# EAGLE board ArduFocuser_V0.09 (EAGLE 6.3)
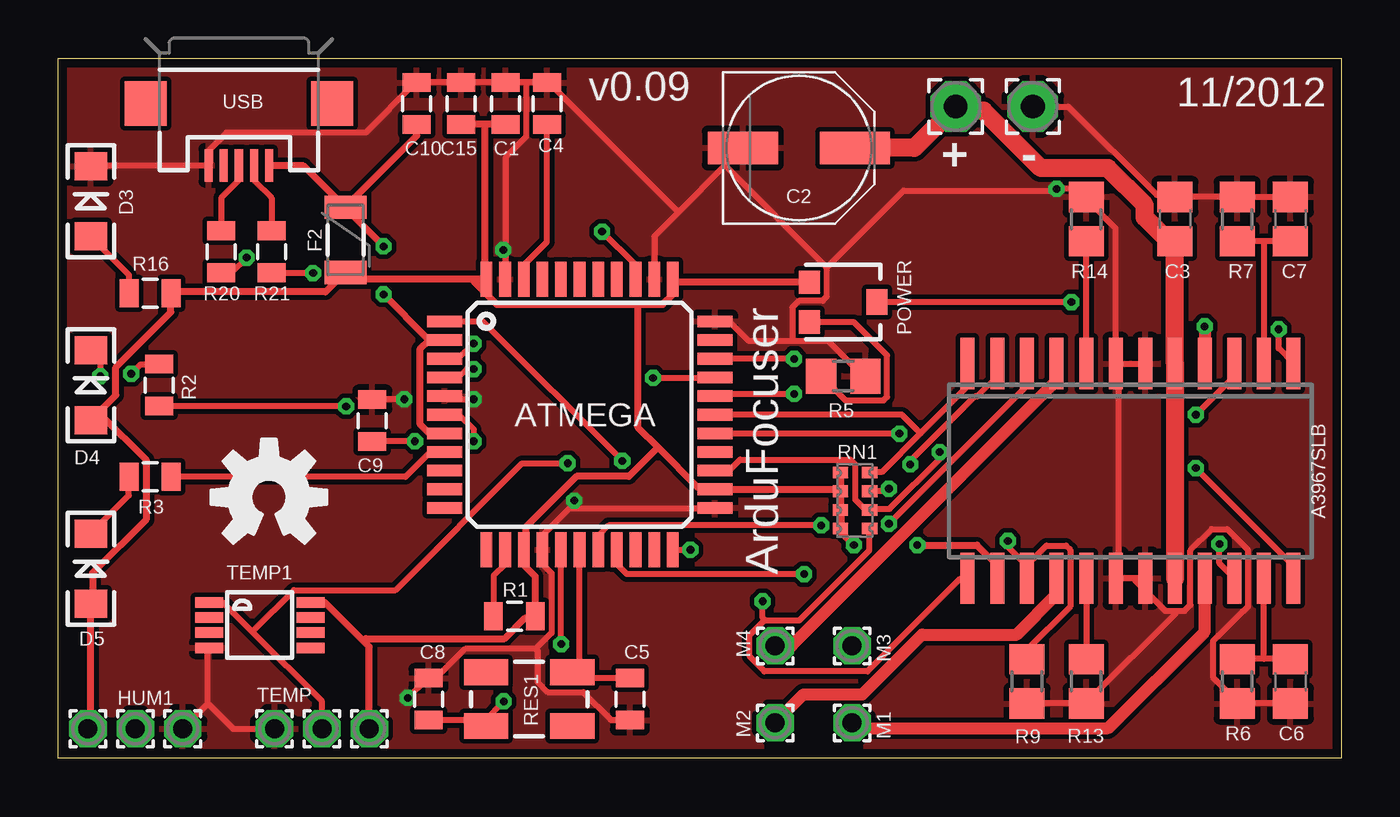
[diagram p0: board, top side]
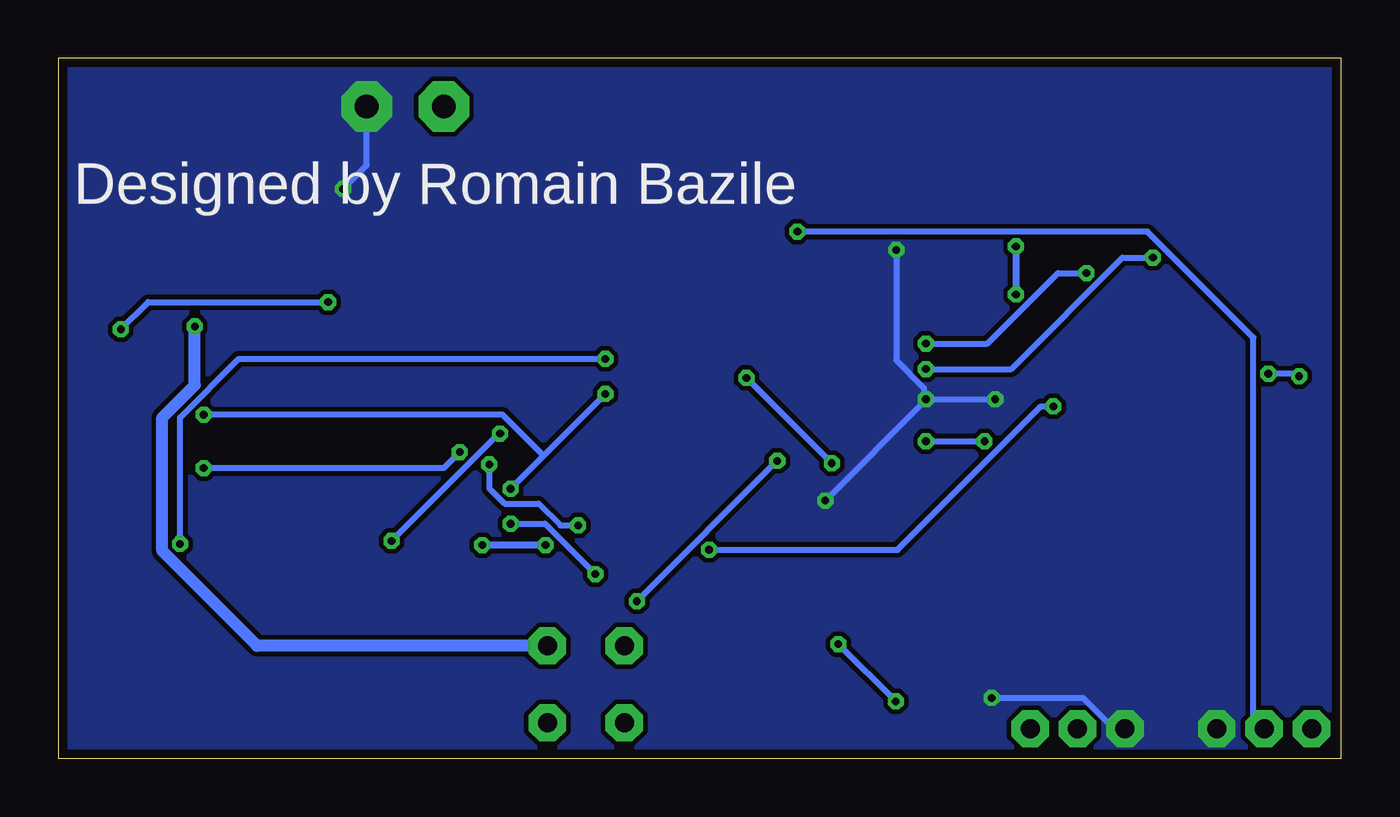
[diagram p1: board, bottom side, seen from below]

Size 55.01 x 30 mm. Coordinates in mm from the lower left corner, seen from the top.
Outline: 55.01,30 55.01,0 0,0 0,30 55.01,30
Copper layers (1*16): Top 0.0356mm / dielectric 1.5011mm / Bottom 0.0356mm
Design rules "LaenPCBOrder *": minimum track width 6mil, minimum drill 13mil, track to track 6mil, track to pad 6mil, pad to pad 6mil, via to via 6mil, smd to smd 6mil, copper to edge 15mil, drill to drill 6mil, minimum pad ring 7mil, minimum via ring 7mil, stop-mask expansion 4mil, vias tented up to drill 0mil, thermal gap 10mil
Net classes: 0 default: width 0.254 mm; 1 power: width 0.762 mm; 2 MOTOR OUT: width 0.508 mm; 3 usbvcc: width 0.305 mm; 4 aref: width 0.305 mm; 5 VCC: width 0.305 mm

## Footprints (pad centres in the part's own frame; a part is rotated, then mirrored left to right if it is on the bottom)
TQFP44 = smd 1.5 x 0.5: 1 -5.8,4; 2 -5.8,3.2; 3 -5.8,2.4; 4 -5.8,1.6; 5 -5.8,0.8; 6 -5.8,0; 7 -5.8,-0.8; 8 -5.8,-1.6; 9 -5.8,-2.4; 10 -5.8,-3.2; 11 -5.8,-4; 23 5.8,-4; 24 5.8,-3.2; 25 5.8,-2.4; 26 5.8,-1.6; 27 5.8,-0.8; 28 5.8,0; 29 5.8,0.8; 30 5.8,1.6; 31 5.8,2.4; 32 5.8,3.2; 33 5.8,4 | smd 0.5 x 1.5: 12 -4,-5.8; 13 -3.2,-5.8; 14 -2.4,-5.8; 15 -1.6,-5.8; 16 -0.8,-5.8; 17 0,-5.8; 18 0.8,-5.8; 19 1.6,-5.8; 20 2.4,-5.8; 21 3.2,-5.8; 22 4,-5.8; 34 4,5.8; 35 3.2,5.8; 36 2.4,5.8; 37 1.6,5.8; 38 0.8,5.8; 39 0,5.8; 40 -0.8,5.8; 41 -1.6,5.8; 42 -2.4,5.8; 43 -3.2,5.8; 44 -4,5.8
0805 = smd 0.8 x 1.2: 1 -0.9,0; 2 0.9,0
PANASONIC_D@1 = smd 3 x 1.4: + 2.4,0; - -2.4,0
C0805 = smd 1.3 x 1.5: 1 -0.95,0; 2 0.95,0
LED-1206 = smd 1.2 x 1.4: A -1.5,0; C 1.5,0
PTC-1206 = smd 1 x 1.8: 1 -1.4,0; 2 1.4,0
1,6/0,8 = drill 0.813 pad 1.6 octagon: 1 0,0
SO24W = smd 0.6 x 2.2: 1 -6.985,-4.6; 2 -5.715,-4.6; 3 -4.445,-4.6; 4 -3.175,-4.6; 5 -1.905,-4.6; 6 -0.635,-4.6; 7 0.635,-4.6; 8 1.905,-4.6; 9 3.175,-4.6; 10 4.445,-4.6; 11 5.715,-4.6; 12 6.985,-4.6; 13 6.985,4.6; 14 5.715,4.6; 15 4.445,4.6; 16 3.175,4.6; 17 1.905,4.6; 18 0.635,4.6; 19 -0.635,4.6; 20 -1.905,4.6; 21 -3.175,4.6; 22 -4.445,4.6; 23 -5.715,4.6; 24 -6.985,4.6
2,15/1,0 = drill 1.016 pad 2.159 octagon: 1 0,0
TRIMPOT-3MM = smd 1 x 0.9: 1 -0.85,-1.45; 3 0.85,-1.45 | smd 1.1 x 0.9: 2 0,1.45
R0805 = smd 1.3 x 1.5: 1 -0.95,0; 2 0.95,0
CRYSTAL-SMD-5X3 = smd 1.9 x 1.1: 1 -1.85,-1.15; 2 1.85,-1.15; 3 1.85,1.15; 4 -1.85,1.15
0603-ARC = smd 0.5 x 0.65: 1 -1.2,-0.625; 2 -0.4,-0.625; 3 0.4,-0.625; 4 1.2,-0.625; 5 1.2,0.625; 6 0.4,0.625; 7 -0.4,0.625; 8 -1.2,0.625
UMAX8 = smd 0.45 x 1.2: 1 -0.975,-2.175; 2 -0.325,-2.175; 3 0.325,-2.175; 4 0.975,-2.175; 5 0.975,2.175; 6 0.325,2.175; 7 -0.325,2.175; 8 -0.975,2.175
USB-MICROB = smd 0.35 x 1.4: D+ 0,2.65; D- -0.65,2.65; GND 1.3,2.65; ID 0.65,2.65; VBUS -1.3,2.65 | smd 1.8 x 1.9: MT1 -4,0; MT2 4,0

## Placement (x,y rotation side)
ATMEGA  ATMEGA32U4-AU  [TQFP44]  22.35,14.73 0 top
C1  1uF  [0805]  19.18,28.07 90 top
C2  100uF  [PANASONIC_D@1]  31.75,26.16 0 top
C3  .1uF  [C0805]  47.88,23.11 90 top
C4  0.1uF  [0805]  20.95,28.07 270 top
C5  22pF  [0805]  24.51,2.54 270 top
C6  680pF  [C0805]  52.83,3.3 270 top
C7  680pF  [C0805]  52.83,23.11 90 top
C8  22pF  [0805]  15.88,2.54 90 top
C9  1uF  [0805]  13.46,14.48 270 top
C10  1uF  [0805]  15.37,28.07 270 top
C15  0.1uF  [0805]  17.27,28.07 270 top
D3  Red  [LED-1206]  1.4,23.88 90 top
D4  Green  [LED-1206]  1.4,16 90 top
D5  Yellow  [LED-1206]  1.4,8.13 90 top
F2  500mA  [PTC-1206]  12.32,22.23 270 top
HUM1  [1,6/0,8]  3.3,1.27 0 top
IC3  A3967SLB  [SO24W]  45.97,12.32 180 top
M1  [1,6/0,8]  34.04,1.52 180 top
M2  [1,6/0,8]  30.73,1.52 180 top
M3  [1,6/0,8]  34.04,4.83 180 top
M4  [1,6/0,8]  30.73,4.83 0 top
PAD1  [1,6/0,8]  1.27,1.27 0 top
PAD2  [1,6/0,8]  5.33,1.27 0 top
PAD8  [1,6/0,8]  9.27,1.27 0 top
PAD10  [1,6/0,8]  13.34,1.27 0 top
PAD11  [2,15/1,0]  41.78,27.94 0 top
PAD12  [2,15/1,0]  38.48,27.94 0 top
POWER  [TRIMPOT-3MM]  33.66,19.56 270 top
R1  10K  [0805]  19.56,6.1 0 top
R2  330  [0805]  4.32,16 90 top
R3  330  [0805]  3.94,12.06 180 top
R5  5.1K  [R0805]  33.66,16.38 180 top
R6  20K  [R0805]  50.55,3.3 90 top
R7  20K  [R0805]  50.55,23.11 270 top
R9  10K  [R0805]  41.53,3.3 90 top
R13  .75  [R0805]  44.07,3.3 90 top
R14  .75  [R0805]  44.07,23.11 270 top
R16  1K  [0805]  3.94,19.94 0 top
R20  22  [0805]  6.99,21.72 90 top
R21  22  [0805]  9.14,21.72 90 top
RES1  16MHz  [CRYSTAL-SMD-5X3]  20.19,2.54 0 top
RN1  10K  [0603-ARC]  34.16,11.05 90 top
TEMP  [1,6/0,8]  11.3,1.27 0 top
TEMP1  DS18B20U  [UMAX8]  8.64,5.71 270 top
U$3  [OSHW-LOGO-M]  9.03,11.19 0 top
USB  USB-MICROB  [USB-MICROB]  7.75,28.07 180 top

## Library data of the parts
ATMEGA = adafruit
C1 C4 C5 C8-C10 C15 D3-D5 F2 POWER R1-R3 R16 R20 R21 RES1 U$3 USB = SparkFun
C2 C3 C6 C7 R5-R7 R9 R13 R14 = rcl
HUM1 M1-M4 PAD1 PAD2 PAD8 PAD10-PAD12 TEMP = wirepad
IC3 = Allegro
RN1 = resistor-dil; OC_FARNELL: unknown; OC_NEWARK: unknown
TEMP1 = 1wire

## Nets
1W: ATMEGA.30 TEMP1.1 TEMP.1
A0: ATMEGA.36 HUM1.1
A1: ATMEGA.37
A2: ATMEGA.38
A3: ATMEGA.39
A4: ATMEGA.40
A5: ATMEGA.41
AREF: ATMEGA.42 C4.2
D11: ATMEGA.12
D12: ATMEGA.26
D13: ATMEGA.32
D17: ATMEGA.8 R3.1
D+: ATMEGA.4 R20.1
D-: ATMEGA.3 R21.1
DIR: ATMEGA.18 IC3.11
ENABLE: ATMEGA.27 IC3.15 R9.2
GND: ATMEGA.5 ATMEGA.15 ATMEGA.23 ATMEGA.33 ATMEGA.35 ATMEGA.43 C1.2 C2.- C3.2 C4.1 C5.2 C6.2 C7.2 C8.2 C9.1 C10.1 C15.1 D3.C IC3.6 IC3.7 IC3.18 IC3.19 PAD2.1 PAD8.1 PAD11.1 R5.1 R6.1 R7.1 R9.1 R13.1 R14.1 TEMP1.4 USB.GND
MISO: ATMEGA.11
MOSI: ATMEGA.10
MS1: ATMEGA.28 IC3.12 RN1.4
MS2: ATMEGA.1 IC3.13 RN1.1
N$1: ATMEGA.16 C8.1 RES1.1
N$3: ATMEGA.17 C5.1 RES1.3
N$6: ATMEGA.6 C9.2
N$7: R21.2 USB.D-
N$8: IC3.8 R14.2
N$9: IC3.17 R13.2
N$10: C7.1 IC3.2 R7.2
N$11: R20.2 USB.D+
N$13: C6.1 IC3.23 R6.2
N$14: IC3.1 POWER.2
N$16: POWER.3 R5.2
N$17: D5.C R3.2
N$18: D4.C R2.2
N$38: D3.A R16.1
OUT1A [MOTOR OUT]: IC3.16 M2.1
OUT1B [MOTOR OUT]: IC3.21 M1.1
OUT2A [MOTOR OUT]: IC3.9 M4.1
OUT2B [MOTOR OUT]: IC3.4 M3.1
PFD: ATMEGA.25 IC3.24 RN1.2
RESET: ATMEGA.31 IC3.22
RESET1: ATMEGA.13 R1.1
RXI: ATMEGA.20
SCK: ATMEGA.9
SLEEP: ATMEGA.29 IC3.3 RN1.3
STEP: ATMEGA.19 IC3.10
TXLED2: ATMEGA.22 R2.1
TXO: ATMEGA.21
UVCC [usbvcc]: ATMEGA.2 ATMEGA.7 C10.2 F2.1 USB.VBUS
V+ [power]: C2.+ C3.1 IC3.5 IC3.20 PAD12.1
VCC [VCC]: ATMEGA.14 ATMEGA.24 ATMEGA.34 ATMEGA.44 C1.1 C15.2 D4.A D5.A F2.2 IC3.14 PAD1.1 PAD10.1 POWER.1 R1.2 R16.2 RN1.5 RN1.6 RN1.7 RN1.8 TEMP1.8

## Tracks (layer width: path | path; a pad name or v marks a point on that pad's centre or on a via)
1W  (via drill 0.33)
  Top 0.254: 8.32,5.42 11.3,2.44 TEMP.1 | 8.32,5.42 7.06,6.68 6.48,6.68 TEMP1.1 | v25.5,16.31 28.14,16.31 ATMEGA.30 | v21.84,12.65 19.89,12.65 14.45,7.21 10.11,7.21 8.32,5.42
  Bottom 0.254: v21.84,12.65 v25.5,16.31
A0  (via drill 0.33)
  Top 0.254: v23.32,22.58 24.74,21.16 24.74,20.55 ATMEGA.36
  Bottom 0.254: v23.32,22.58 8.31,22.58 3.76,18.03 3.76,1.73 HUM1.1
AREF
  Top 0.254: C4.2 20.95,22.15 19.96,21.16 19.96,20.55 ATMEGA.42
D17
  Top 0.254: R3.1 14.88,12.06 15.95,13.13 16.54,13.13 ATMEGA.8
D+  (via drill 0.33)
  Top 0.254: v8.08,21.46 7.44,20.83 R20.1 | v17.8,16.69 17.53,16.69 17.17,16.33 ATMEGA.4
  Bottom 0.254: v8.08,21.46 9.37,21.46 14.15,16.69 v17.8,16.69
D-  (via drill 0.33)
  Top 0.254: v10.92,20.8 9.14,20.8 R21.1 | v17.8,17.78 17.17,17.14 16.56,17.14 ATMEGA.3
  Bottom 0.254: v10.92,20.8 12.14,20.8 15.16,17.78 v17.8,17.78
DIR  (via drill 0.33)
  Top 0.254: v32.72,9.98 23.6,9.98 23.16,9.55 23.16,8.94 ATMEGA.18 | v36.52,12.6 36.52,12.75 39.29,15.52 39.4,15.52 40.26,16.38 IC3.11
  Bottom 0.254: v32.72,9.98 33.48,9.98 34.42,10.92 35.87,10.92 36.52,11.58 v36.52,12.6
ENABLE  (via drill 0.33)
  Top 0.254: v36.07,13.92 28.17,13.92 ATMEGA.27 | v40.72,9.32 40.72,9.07 41.53,8.26 IC3.15 41.6,8.36 42.37,9.12 43.2,9.12 43.38,8.94 43.38,6.5 41.53,4.65 R9.2
  Bottom 0.254: v36.07,13.92 36.12,13.92 v40.72,9.32
GND  (via drill 0.33)
  Top 0.254: C7.2 52.83,24.08 50.65,24.08 R7.1 50.55,24.08 47.88,24.08 C3.2 47.78,24.16 47.09,24.16 43.31,27.94 PAD11.1 | IC3.7 45.34,22.71 44.07,23.98 R14.1 43.97,24.13 43.69,24.41 v42.8,24.41 42.7,24.33 36.25,24.33 33.05,21.13 32.94,21.06 | IC3.6 45.44,16.92 IC3.7 | R9.1 41.53,2.36 44.07,2.36 R13.1 44.15,2.46 47.9,6.22 47.9,6.33 | C6.2 52.83,2.36 50.55,2.36 R6.1 50.47,2.46 50.47,2.52 49.51,3.48 49.51,5.03 50.8,6.33 50.83,6.33 51,6.5 51,8.94 50.11,9.83 49.45,9.83 48.54,8.91 48.54,6.58 48.28,6.33 47.9,6.33 | 46.18,7.72 IC3.19 | 46.18,7.72 IC3.18 45.47,7.82 45.47,16.79 IC3.7 | 47.9,6.33 47.47,6.33 46.18,7.62 46.18,7.72 | TEMP1.4 6.4,4.62 6.4,2.34 | PAD2.1 6.4,2.34 | PAD8.1 7.49,1.27 6.5,2.26 6.4,2.34 | v14.83,15.39 13.46,15.39 C9.1 | v17.8,15.39 16.69,15.39 ATMEGA.5 | 20.47,4.7 17.45,4.7 16.2,3.45 15.88,3.45 C8.2 15.77,3.38 v14.99,2.59 | 20.47,4.7 21.16,5.38 21.16,7.92 20.78,8.31 20.78,8.91 ATMEGA.15 20.8,9.04 20.8,9.6 21.92,10.72 22.12,10.72 | C5.2 24.51,1.65 23.7,1.65 22.5,2.85 20.98,2.85 20.55,3.28 20.55,4.6 20.47,4.7 | 22.12,10.72 28.14,10.72 ATMEGA.23 | 22.12,10.72 v22.12,11.05 | R5.1 34.52,16.38 32.99,17.91 31.47,17.91 | 31.47,17.91 29.59,17.91 28.78,18.72 28.17,18.72 ATMEGA.33 | 28.59,25.41 29.34,26.16 C2.- | 28.59,25.41 26.58,23.41 | 26.58,23.41 25.55,22.38 25.55,20.55 ATMEGA.35 | 31.47,17.91 31.47,19.33 31.75,19.61 32.77,19.61 32.94,19.79 32.94,21.06 | 28.59,25.41 32.94,21.06 | D3.C 1.4,25.4 6.43,25.4 USB.GND 6.5,25.53 6.5,26.11 7.21,26.82 13.18,26.82 15.27,28.91 C10.1 15.37,28.98 17.27,28.98 C15.1 17.37,28.98 19.07,28.98 C1.2 19.18,28.98 20.07,28.98 | 20.07,28.98 20.95,28.98 C4.1 21.06,28.93 26.58,23.41
  Top 0.254: 19.18,21.79 19.18,25.76 20.07,26.64 20.07,28.98 | 19.18,21.79 19.18,20.55 ATMEGA.43 | v19.07,21.79 19.18,21.79
  Bottom 0.254: PAD11.1 41.78,25.43 v42.8,24.41 | v17.8,15.39 v14.83,15.39 | v22.12,11.05 17.88,15.29 v17.8,15.39 | PAD8.1 9.75,1.27 11.07,2.59 v14.99,2.59 | v19.07,21.79 19.07,17.07 17.88,15.88 17.88,15.49 v17.8,15.39
  pour Bottom (isolate 0.203, no thermals): -0.25,-0.38 55.26,-0.38 55.26,30.19 -0.25,30.19
  pour Top (isolate 0.203): -0.25,-0.38 55.26,-0.38 55.26,30.19 -0.25,30.19
MS1
  Top 0.254: 36.97,13.93 38.99,15.95 IC3.12 | 36.97,13.93 35.31,12.27 34.8,12.27 RN1.4 | ATMEGA.28 36.17,14.73 36.97,13.93
MS2  (via drill 0.33)
  Top 0.254: 30.28,5.92 31.77,5.92 34.77,8.91 34.77,9.83 RN1.1 | 30.28,5.92 29.64,5.28 29.64,4.37 30.28,3.73 34.7,3.73 38.66,7.7 38.99,7.7 IC3.13 | v24.18,12.75 18.21,18.72 ATMEGA.1 | v30.2,6.73 30.2,6.02 30.28,5.92
  Bottom 0.254: v30.2,6.73 v24.18,12.75
N$1  (via drill 0.33)
  Top 0.254: C8.1 15.88,1.63 18.11,1.63 RES1.1 18.29,1.63 v19.1,2.44 | v21.57,4.9 21.57,8.91 ATMEGA.16
  Bottom 0.254: v19.1,2.44 v21.57,4.9
N$3
  Top 0.254: C5.1 24.51,3.45 22.28,3.45 RES1.3 22.35,3.56 ATMEGA.17
N$6  (via drill 0.33)
  Top 0.254: v15.29,13.59 C9.2 | v17.8,13.59 17.8,14.1 17.17,14.73 ATMEGA.6
  Bottom 0.254: v17.8,13.59 v15.29,13.59
N$7
  Top 0.254: R21.2 9.14,24.03 8.41,24.77 8.41,25.4 USB.D-
N$8
  Top 0.254: IC3.8 R14.2
N$9
  Top 0.254: IC3.17 R13.2
N$10
  Top 0.254: 51.69,22.17 52.83,22.17 C7.1 | 51.69,22.17 50.55,22.17 R7.2 | 51.69,22.17 IC3.2
N$11
  Top 0.254: R20.2 6.99,24.03 7.75,24.79 USB.D+
N$13
  Top 0.254: 51.69,4.27 52.83,4.27 C6.1 | 51.69,4.27 50.55,4.27 R6.2 | 51.69,4.27 IC3.23
N$14  (via drill 0.33)
  Top 0.254: v43.43,19.56 POWER.2 | v52.32,18.39 52.32,17.58 52.96,16.94 IC3.1
  Bottom 0.254: v43.43,19.56 51.16,19.56 v52.32,18.39
N$16
  Top 0.254: POWER.3 32.21,18.69 34.11,18.69 35.53,17.27 35.53,15.49 35.38,15.34 33.76,15.34 32.72,16.38 R5.2
N$17
  Top 0.254: R3.2 3.02,12.06 3.02,11.28 1.4,9.65 D5.C
N$18  (via drill 0.33)
  Top 0.254: v3.12,16.48 3.53,16.89 R2.2 | v1.8,16.38 1.8,17.09 D4.C
  Bottom 0.254: v3.12,16.48 1.91,16.48 v1.8,16.38
N$38
  Top 0.254: R16.1 3.02,19.94 3.02,20.73 1.4,22.35 D3.A
OUT1A
  Top 0.508: IC3.16 42.8,7.01 41.1,5.31 37.03,5.31 34.47,2.74 31.95,2.74 M2.1
OUT1B
  Top 0.508: IC3.21 49.15,5.44 45.01,1.29 34.27,1.29 M1.1
OUT2A
  Top 0.508: IC3.9 42.8,16.18 31.45,4.83 M4.1
OUT2B  (via drill 0.33)
  Top 0.508: v49.15,18.52 IC3.4
  Bottom 0.508: v49.15,18.52 49.15,16 50.55,14.61 50.55,8.89 46.48,4.83 M3.1
PFD  (via drill 0.33)
  Top 0.254: ATMEGA.25 28.17,12.34 28.78,12.34 29.23,12.8 33.96,12.8 34.16,12.6 34.16,11.1 34.59,10.67 34.77,10.67 RN1.2 34.9,10.69 35.64,10.69 37.8,12.85 v37.8,13.13 | IC3.24 52.96,8.26 v48.77,12.45
  Bottom 0.254: v48.77,12.45 38.48,12.45 v37.8,13.13
RESET  (via drill 0.33)
  Top 0.254: v31.55,17.12 28.17,17.12 ATMEGA.31 | v49.78,9.2 49.78,8.36 IC3.22
  Bottom 0.254: v31.55,17.12 47.27,17.12 49.78,14.61 v49.78,9.2
RESET1
  Top 0.254: R1.1 18.67,7.85 19.15,8.33 19.15,8.91 ATMEGA.13
SLEEP  (via drill 0.33)
  Top 0.254: v35.61,11.56 35.51,11.46 RN1.3 | v31.55,15.62 28.25,15.62 28.17,15.54 ATMEGA.29 | IC3.3 50.42,16.38 v48.77,14.73
  Bottom 0.254: v31.55,15.62 34.2,12.97 | 34.2,12.97 v35.61,11.56 | v48.77,14.73 35.97,14.73 34.2,12.97
STEP  (via drill 0.33)
  Top 0.254: v31.98,7.9 24.38,7.9 23.95,8.33 23.95,8.91 ATMEGA.19 | v35.61,10.06 41.53,15.98 IC3.10
  Bottom 0.254: v31.98,7.9 34.14,10.06 v35.61,10.06
TXLED2  (via drill 0.33)
  Top 0.254: v12.34,15.09 4.32,15.09 R2.1 | v27.1,8.94 26.36,8.94 ATMEGA.22
  Bottom 0.254: v12.34,15.09 12.88,15.09 19.02,8.94 v27.1,8.94
UVCC  (via drill 0.33)
  Top 0.305: 15.88,17.91 15.49,17.53 15.49,14.35 15.9,13.95 16.54,13.95 ATMEGA.7 | 15.88,17.91 16.54,17.91 ATMEGA.2 | C10.2 15.37,26.7 12.32,23.65 F2.1 | USB.VBUS 9.07,25.4 10.52,25.4 12.19,23.72 F2.1 | v13.95,19.89 15.8,18.03 15.88,17.91 | v13.95,21.95 12.39,23.5 F2.1
  Bottom 0.305: v13.95,21.95 v13.95,19.89
V+
  Top 0.762: C2.+ 36.7,26.16 PAD12.1 38.84,27.76 39.67,27.76 42.14,25.3 45.01,25.3 46.58,23.72 46.58,23.19 47.52,22.25 C3.1 IC3.5 IC3.20
VCC  (via drill 0.33)
  Top 0.305: 13.08,5.03 13.34,4.78 PAD10.1 | 13.08,5.03 11.43,6.68 TEMP1.8 | 13.08,5.03 13.18,5.13 19.13,5.13 20.02,6.02 20.32,6.02 R1.2 20.45,6.1 20.45,7.8 19.96,8.28 19.96,8.91 ATMEGA.14 20.04,9.07 20.04,9.91 22.23,12.09 24.46,12.09 25.7,13.34 | RN1.6 33.55,11.43 33.55,10.79 RN1.7 33.55,10.64 33.55,9.86 RN1.8 33.55,9.7 v34.11,9.14 | RN1.5 33.55,12.24 33.55,11.58 RN1.6 | RN1.6 33.4,11.53 28.17,11.53 ATMEGA.24 28.02,11.61 27.43,11.61 25.7,13.34 | IC3.14 40.26,8.28 39.4,9.14 v36.83,9.14 | PAD1.1 1.4,1.4 D5.A 1.47,6.76 1.47,7.95 3.76,10.24 3.76,12.8 1.83,14.73 D4.A 2.46,15.57 2.46,16.76 4.83,19.13 4.83,19.94 R16.2 4.98,19.99 11.46,19.99 12.19,20.73 F2.2 12.32,20.8 12.57,20.55 17.83,20.55 | POWER.1 32.18,20.42 26.47,20.42 26.36,20.52 ATMEGA.34 26.39,20.3 26.39,19.94 25.91,19.46 24.84,19.46 | 18.29,27.18 C1.1 | 18.29,27.18 C15.2 | 17.83,20.55 18.34,20.55 ATMEGA.44 18.29,20.7 18.29,27.18 | 24.84,19.46 18.8,19.46 17.83,20.42 17.83,20.55 | 25.7,13.34 24.84,14.2 24.84,19.46
  Bottom 0.305: v34.11,9.14 v36.83,9.14

## Text on the board
tNames: 11/2012 | v0.09 | + | - | ArduFocuser
bNames: Designed by Romain Bazile